# Altium PCB MercAp_PCB.PcbDoc
Units mm, origin at the board's own origin, x right, y up, seen from the top; angles counter-clockwise.
Board outline 70.1 x 75 mm, 4 copper layers (TopLayer, MidLayer1, MidLayer2, BottomLayer), stack 1.57 mm thick; 70 components, 34 nets, 192 pads, 44 vias.
Unrouted connection lines stored in the file: 9.
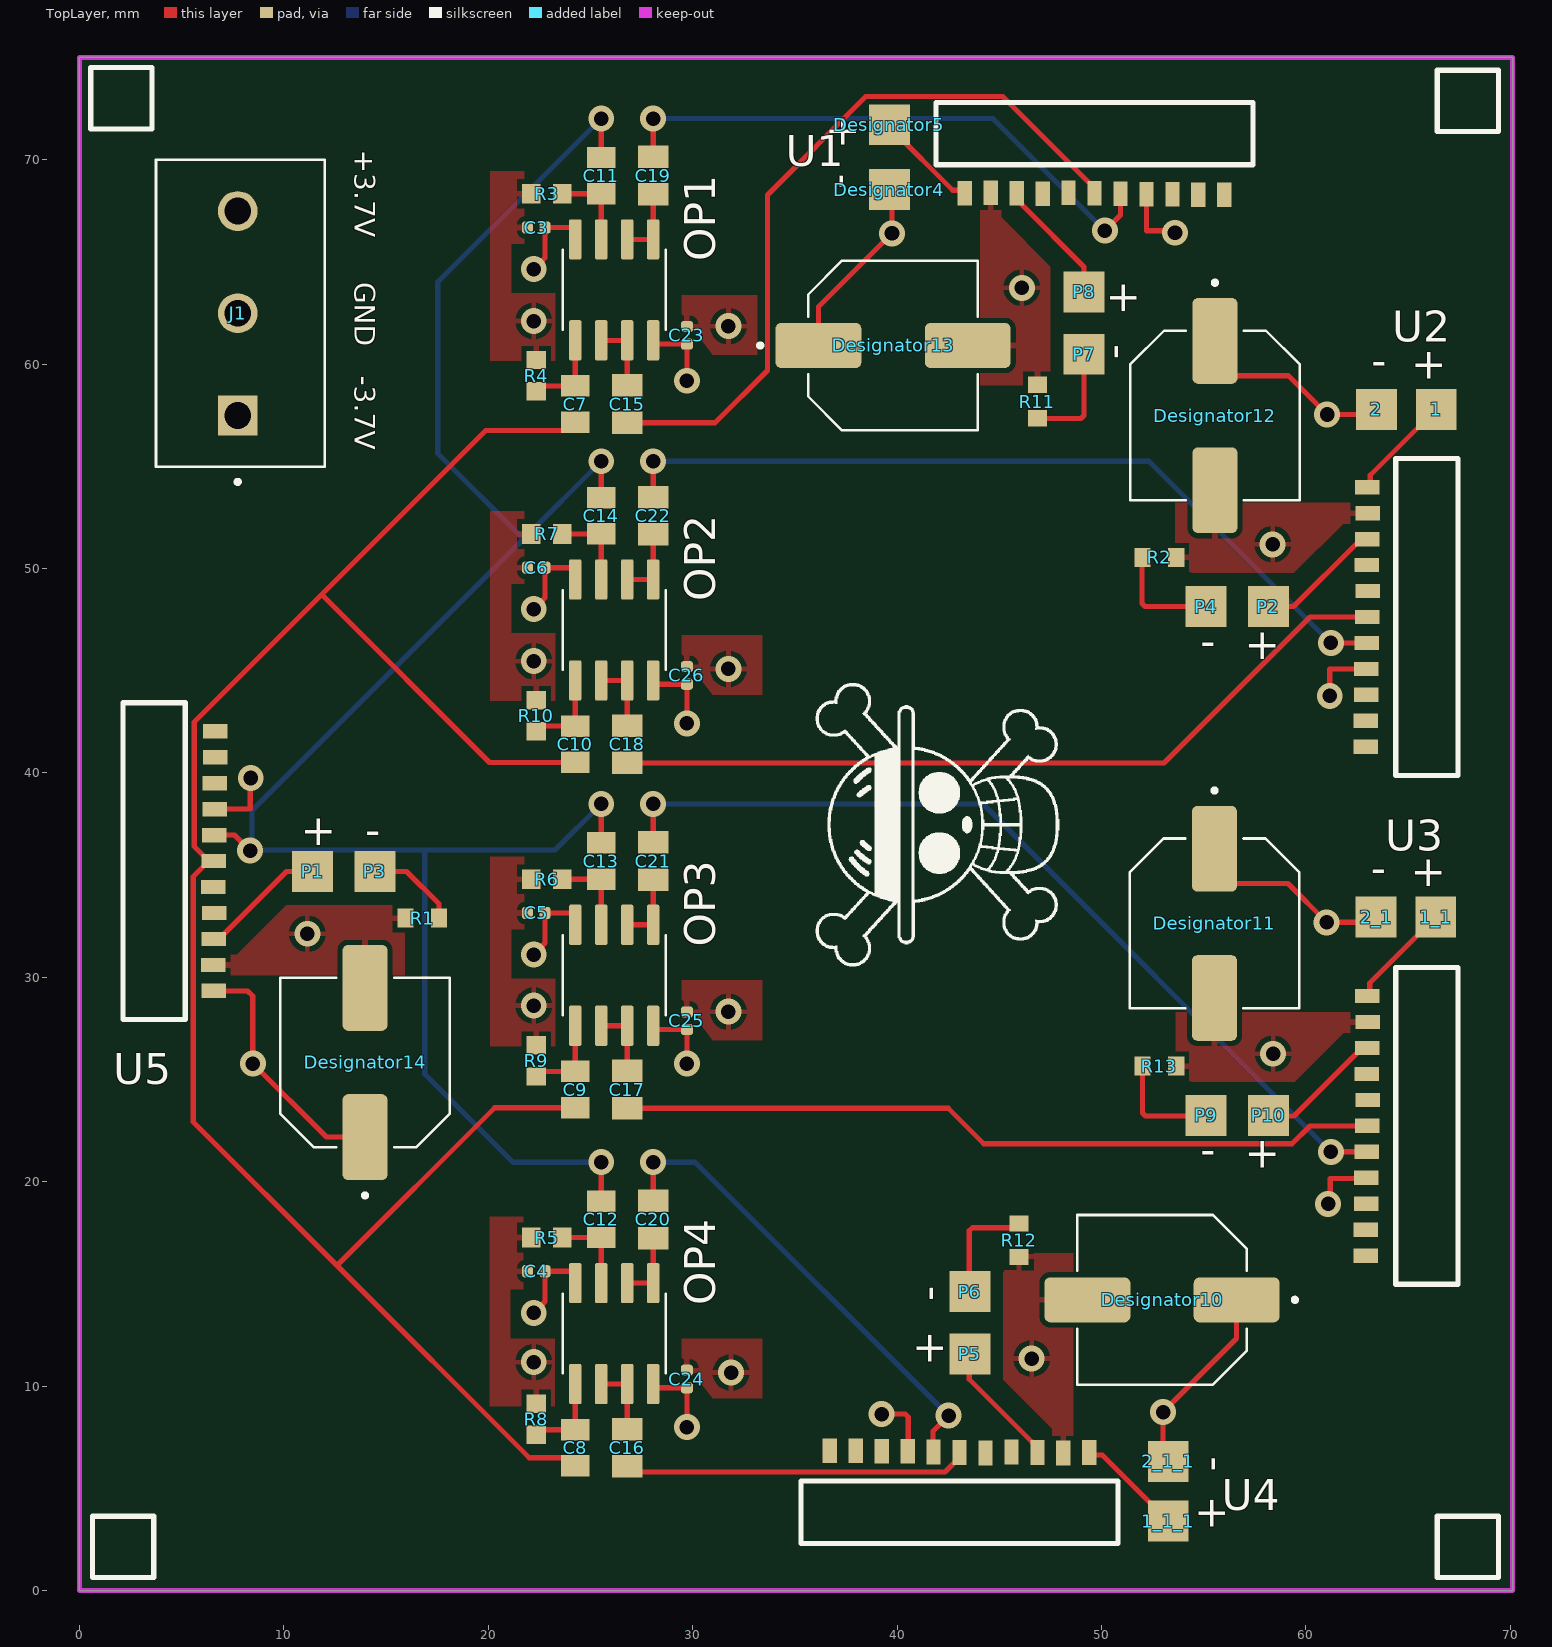
[diagram p0: TopLayer view]
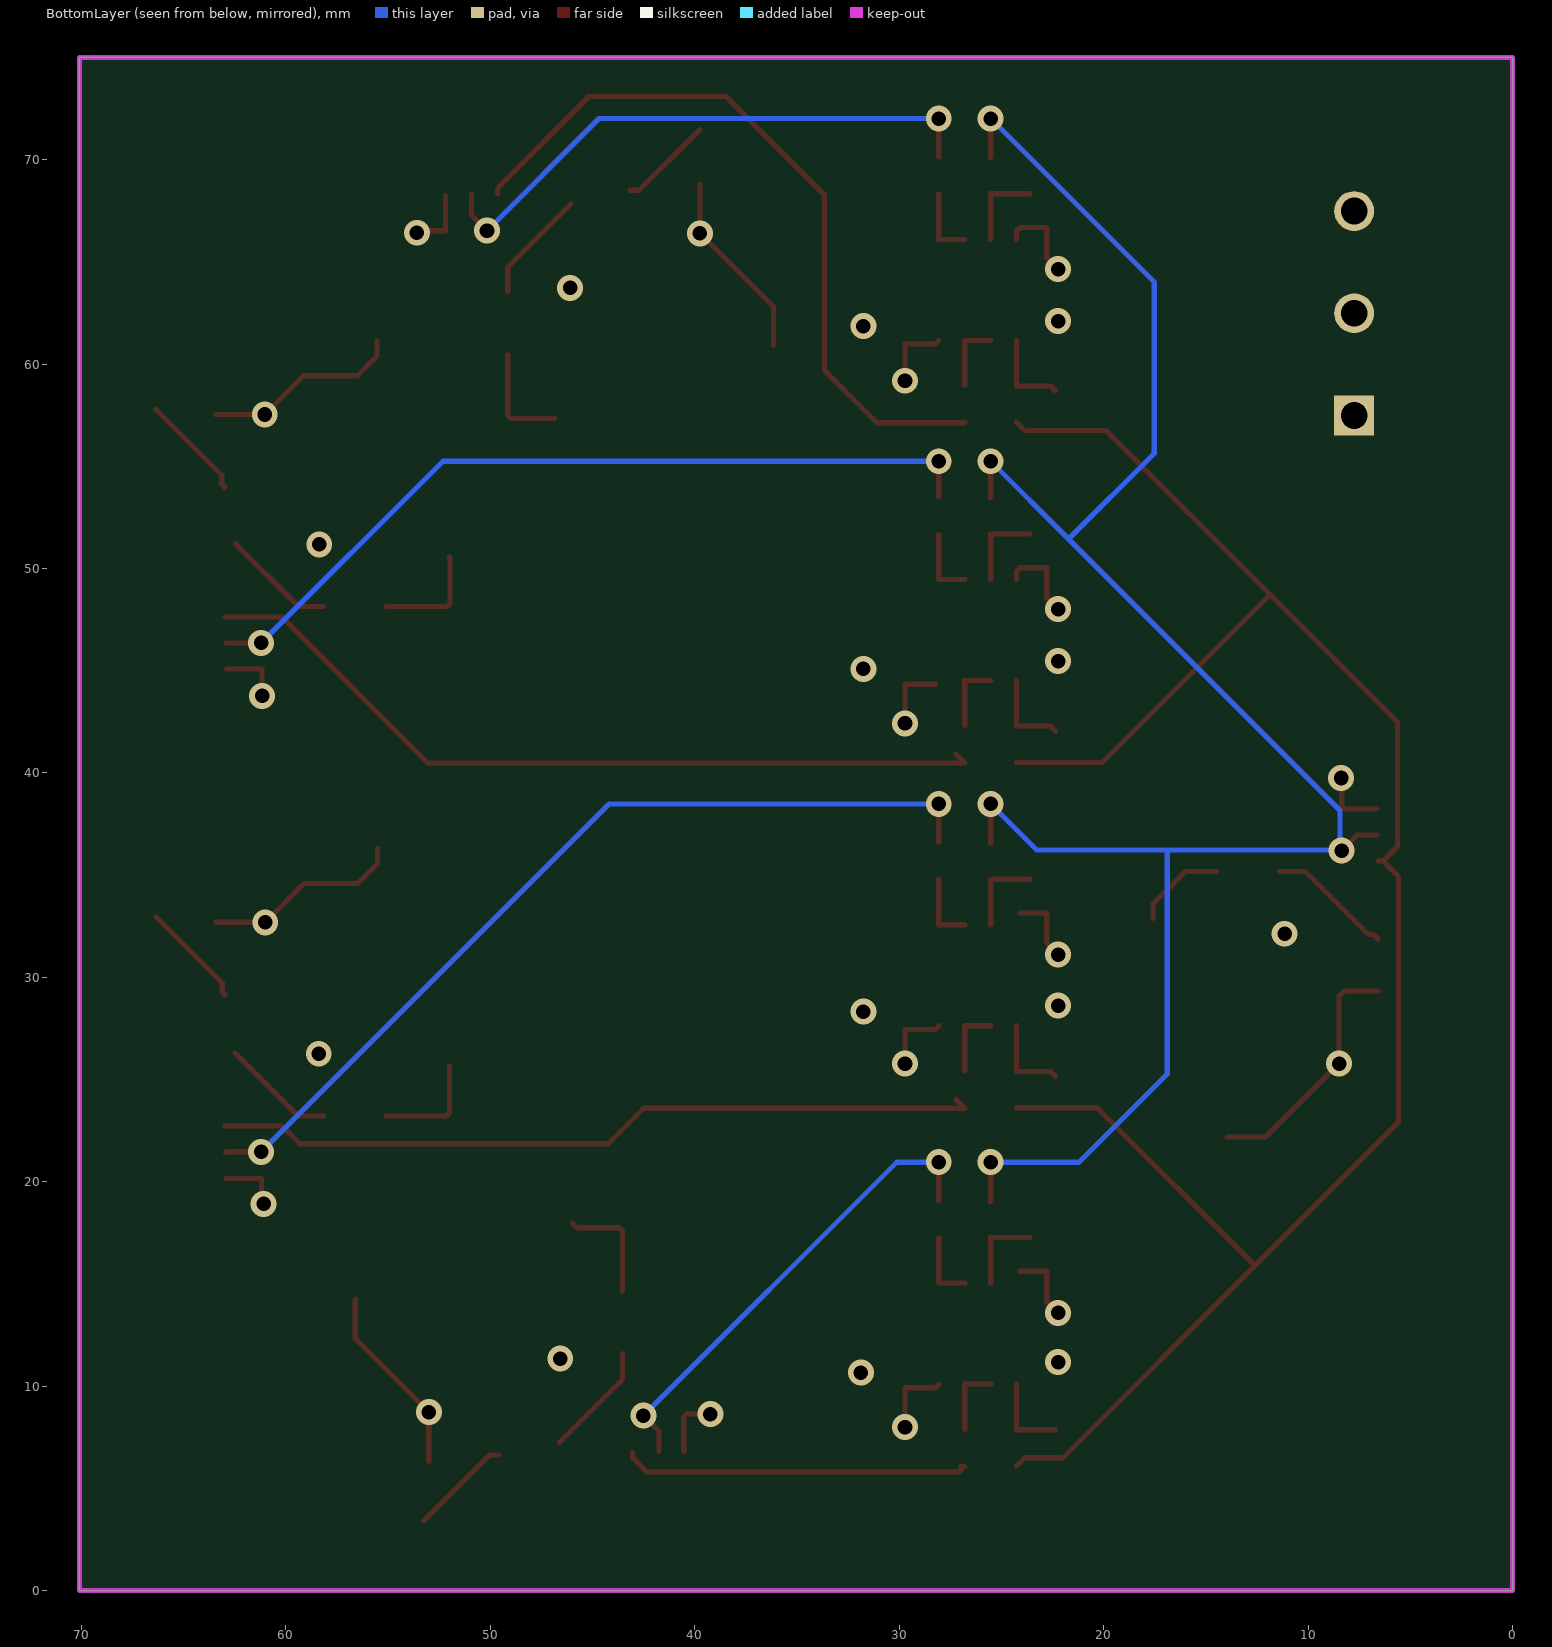
[diagram p1: BottomLayer view, seen from below]
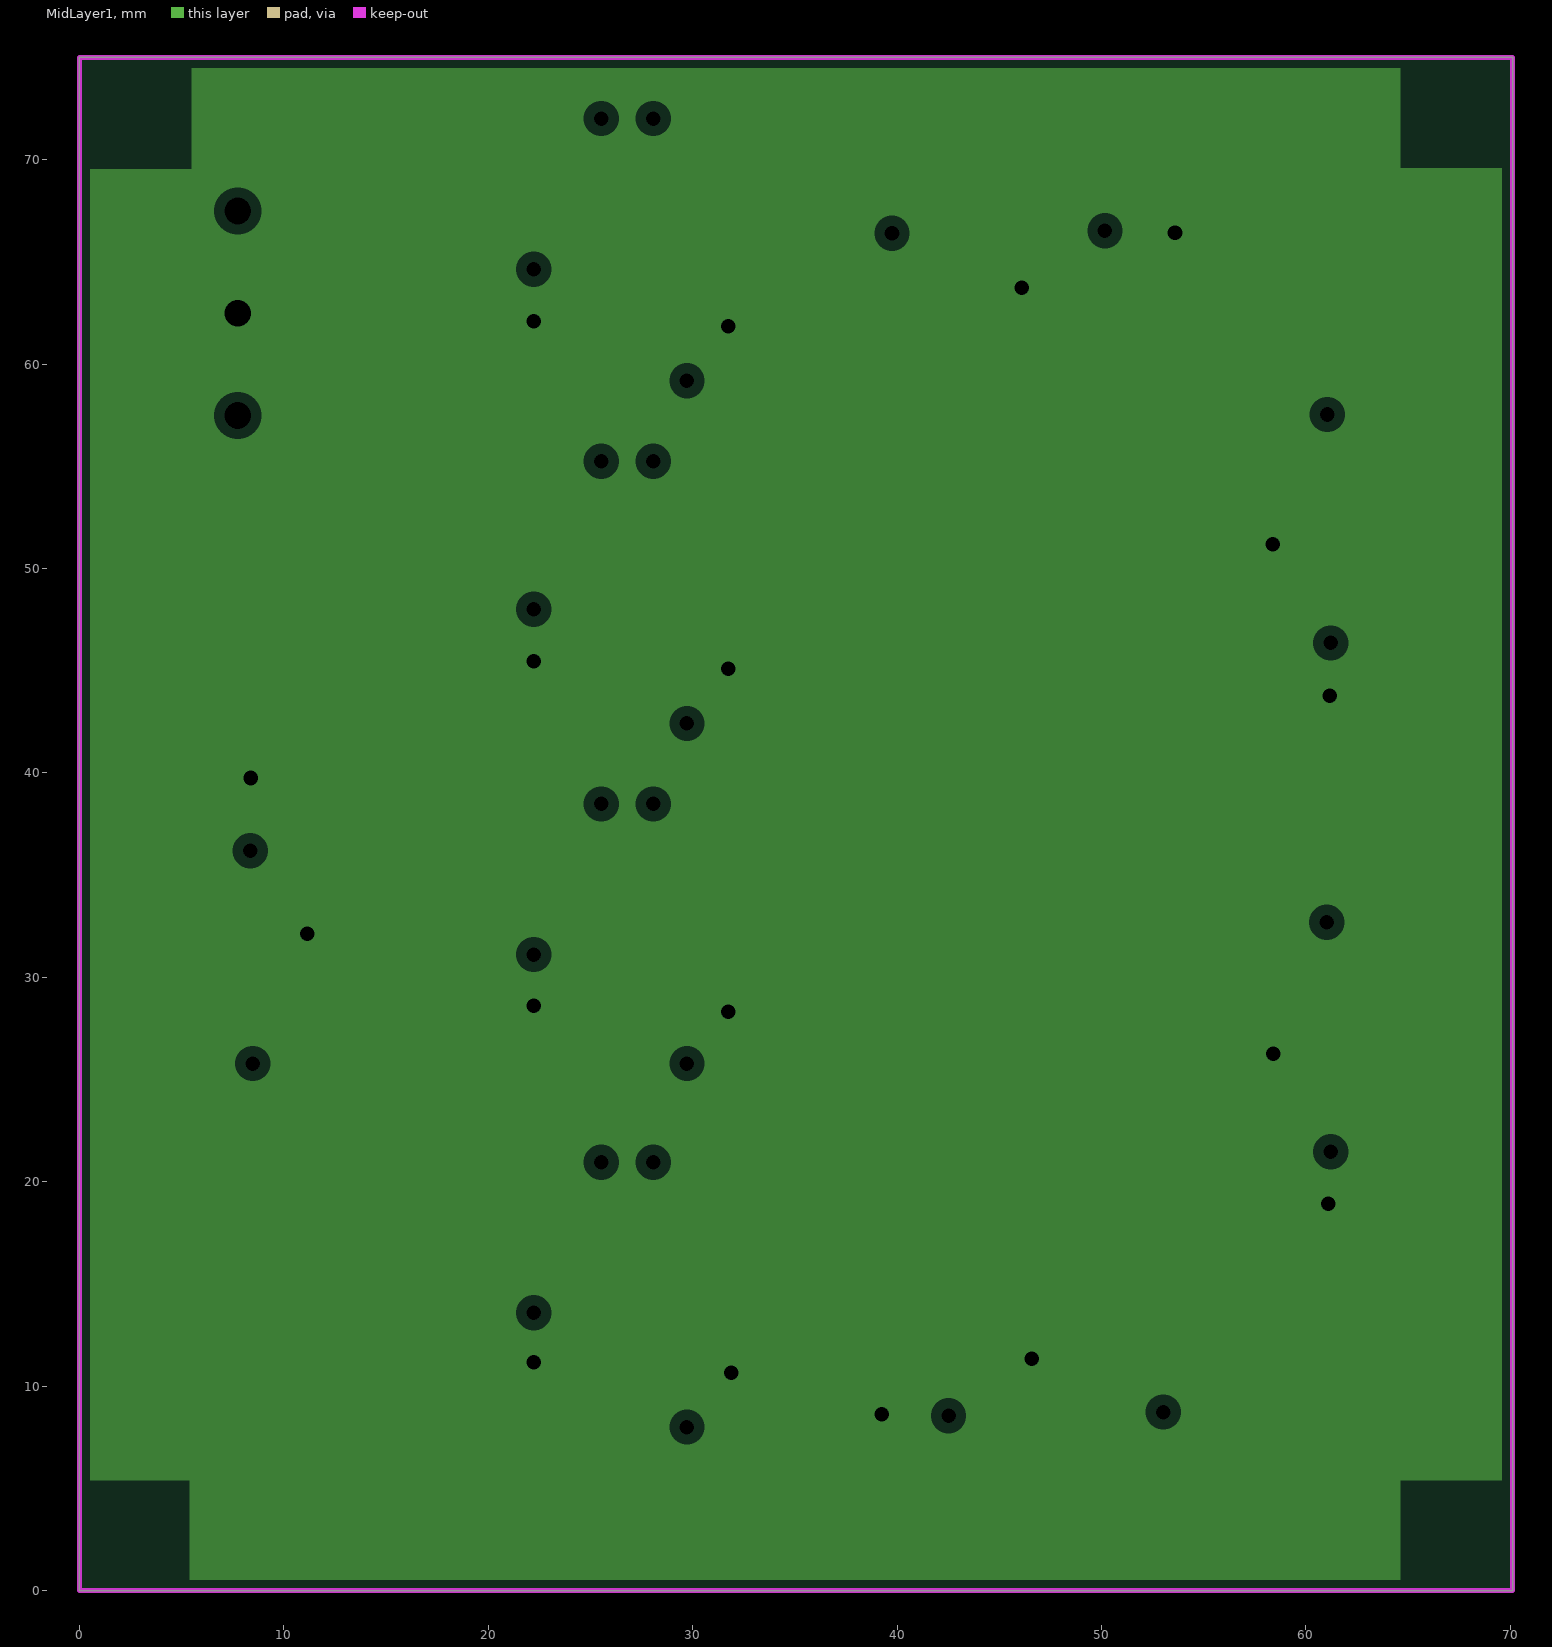
[diagram p2: MidLayer1, clearances drawn from the general rule]
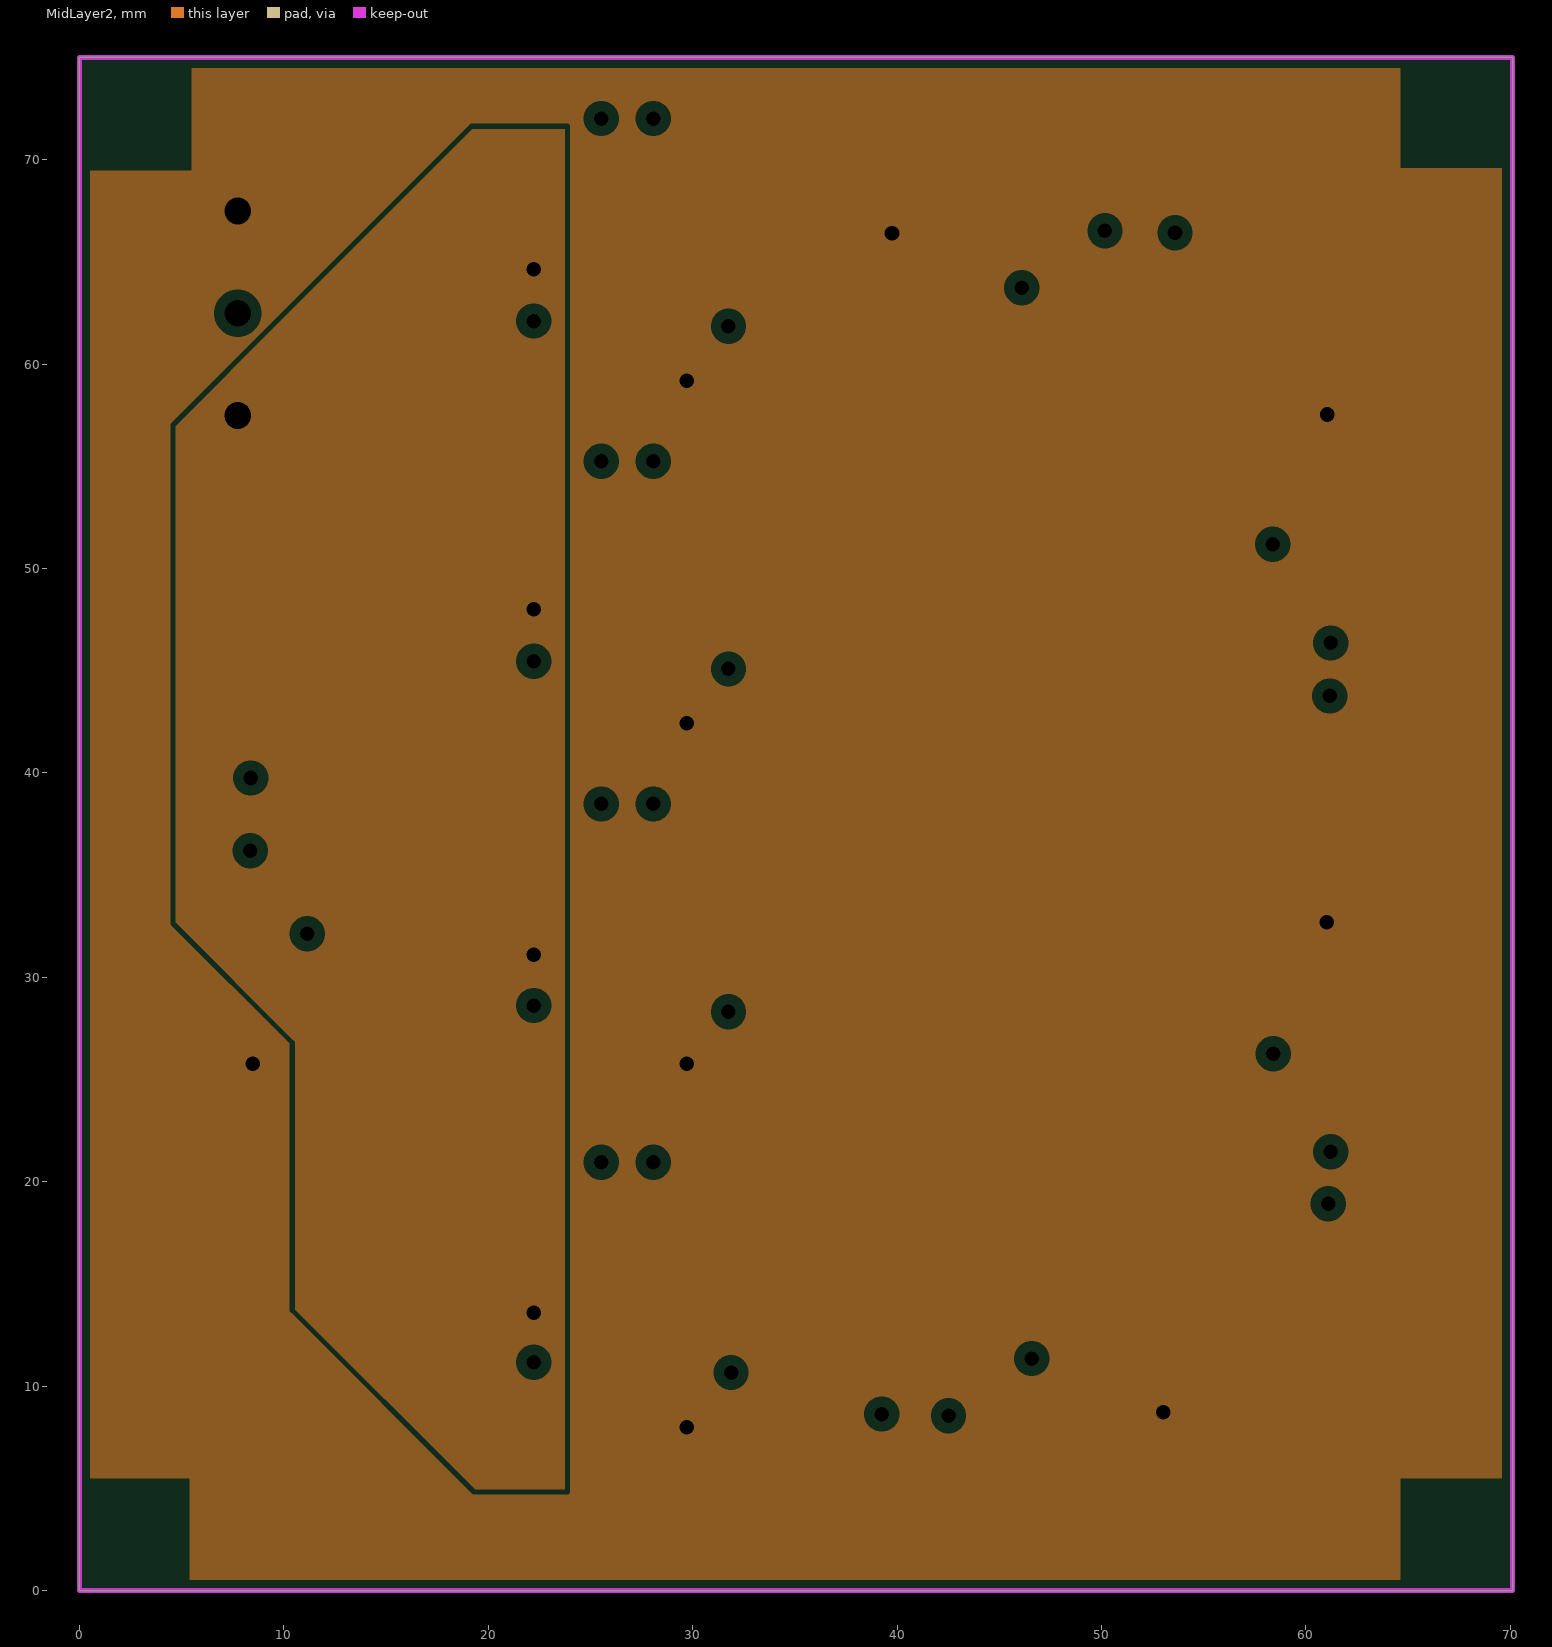
[diagram p3: MidLayer2, clearances drawn from the general rule]
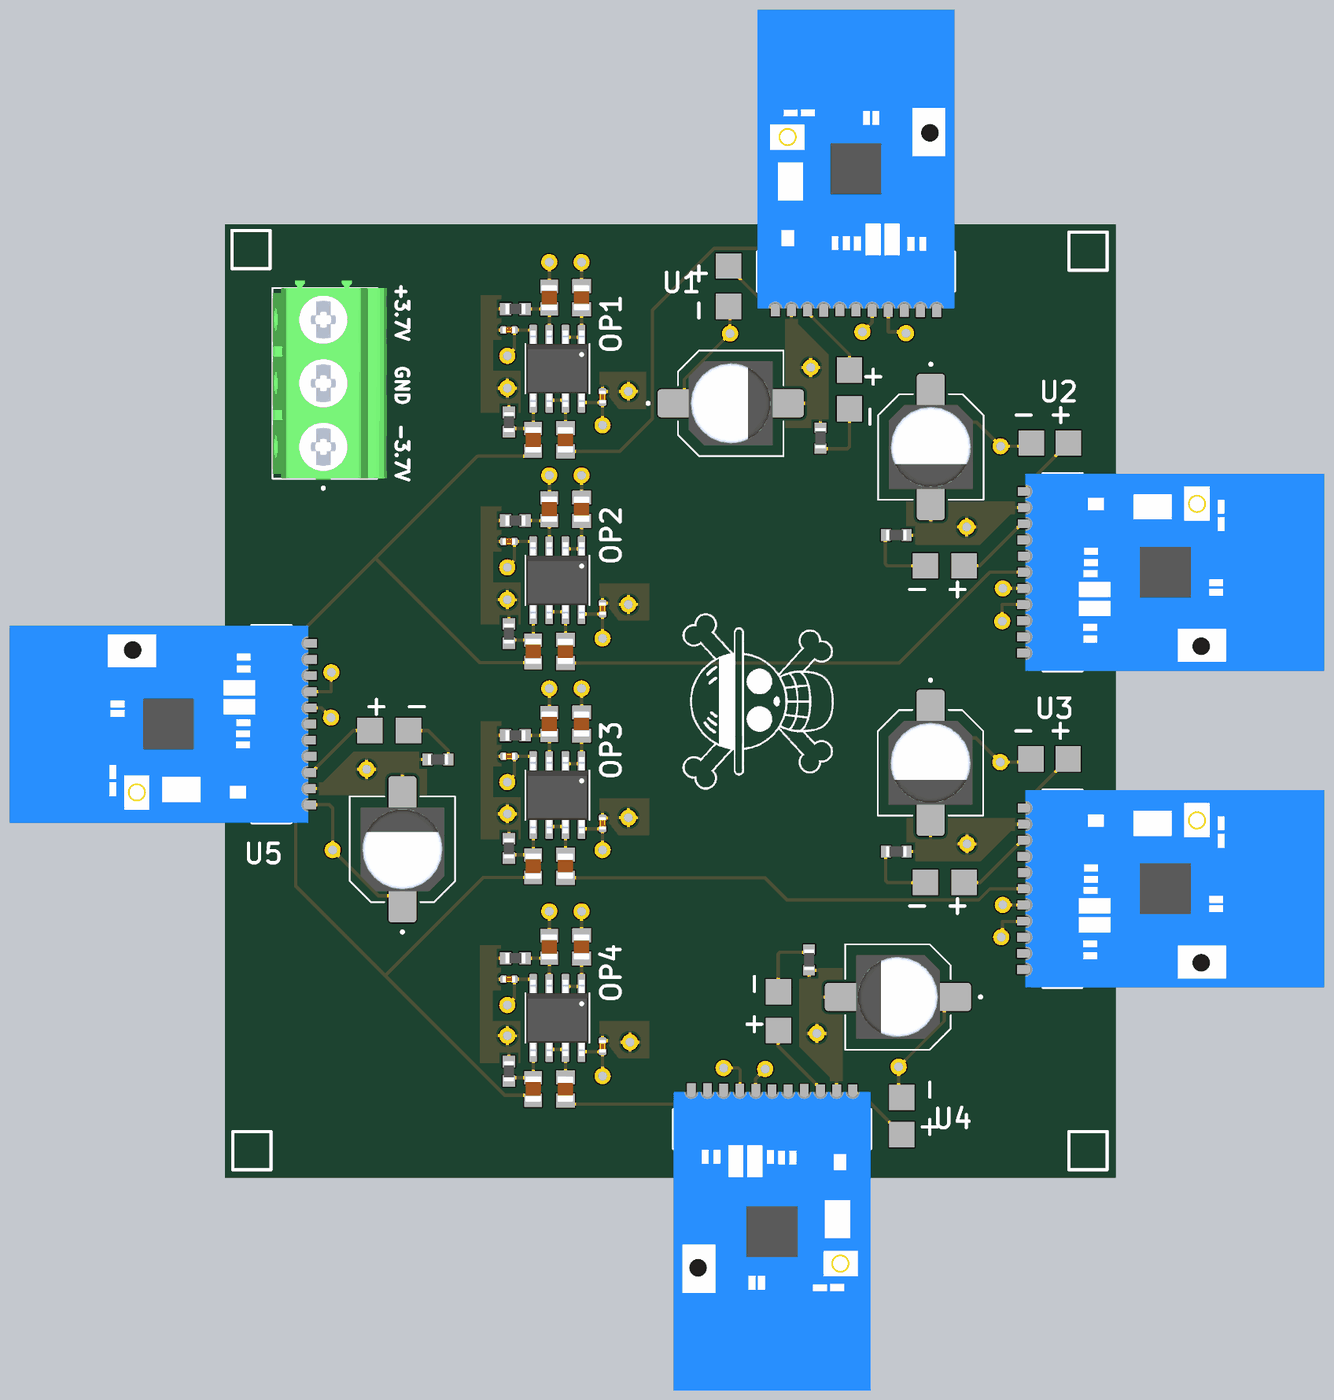
[diagram p4: 3D render of the assembled board from above, using the file's embedded part models]

## Layer stack, top to bottom
Top Solder: solder mask 0.015, Solder Resist, Dk 3.8
TopLayer: signal copper 0.035
Dielectric 2: prepreg 0.2, 7628, Dk 4.6
MidLayer1: plane copper 0.0175, net GND
Dielectric 1: core 1.065, FR-4, Dk 4.5
MidLayer2: plane copper 0.0175, net (Multiple Nets)
Dielectric 3: prepreg 0.2, 7628, Dk 4.6
BottomLayer: signal copper 0.035
Bottom Solder: solder mask 0.015, Solder Resist, Dk 3.8

## Board outline
0,0 0,75 70.104,75 70.104,0

## Design rules (kind name [scope] priority, off if disabled: settings)
Clearance [All] p1: gap=0.254 ignorepadtopadclearanceinfootprint=FALSE
PlaneClearance [All] p1: clearance=0.508
PlaneConnect [All] p1: planeconnectstyle=Relief reliefexpansion=0.508 reliefentries=4 reliefconductorwidth=0.254 reliefairgap=0.254
PolygonConnect [All] p1: connectstyle=Relief reliefconductorwidth=0.254 reliefentries=4 polygonreliefangle="90 Angle" airgapwidth=0.254
RoutingVias [All] p1: holewidth=0.711 width=1.27 viastyle="Through Hole" minholewidth=0.3 minwidth=0.45 maxholewidth=0.711 maxwidth=1.27
SolderMaskExpansion [All] p1: expansion=0.102 istentingtop=FALSE
Width [All] p1: maxlimit=0.254 minlimit=0.254 preferedwidth=0.254
28 further rules are at their usual default settings.

## Classes and differential pairs
component class Sheet1: C8 C10 C13 C14 C16 C18 C20 C22 C23 C25 C26 J1 OP1 OP3 OP4 P2 P8 P10 R2 R4 R6 R9 R10 R12 U2 U4

## Components (designator, comment, footprint, x,y, rotation, side; value= is the part's Value field where it differs from the comment)
1 "Comment" SolderWirePad_1x01_SMD_5x10mm 66.371,57.785 r180 top
1_1 "Comment" SolderWirePad_1x01_SMD_5x10mm 66.347,32.946 r180 top
1_1_1 "Comment" SolderWirePad_1x01_SMD_5x10mm 53.266,3.401 r90 top
2 "Comment" SolderWirePad_1x01_SMD_5x10mm 63.45,57.785 r180 top
2_1 "Comment" SolderWirePad_1x01_SMD_5x10mm 63.426,32.946 r180 top
2_1_1 "Comment" SolderWirePad_1x01_SMD_5x10mm 53.266,6.322 r90 top
C3 "CL05B104KP5NNNC" CAPC1005X55N 22.352,66.675 r0 top value=0.1uF (schematic designator C7)
C4 "CL05B104KP5NNNC" CAPC1005X55N 22.352,15.621 r0 top value=0.1uF (schematic designator C28)
C5 "CL05B104KP5NNNC" CAPC1005X55N 22.352,33.147 r0 top value=0.1uF (schematic designator C21)
C6 "CL05B104KP5NNNC" CAPC1005X55N 22.352,50.038 r0 top value=0.1uF (schematic designator C14)
C7 "GRM21BR61C106KE15K" CAPC2012X135N 24.257,58.039 r90 top value=10uF (schematic designator C6)
C8 "GRM21BR61C106KE15K" CAPC2012X135N 24.257,6.985 r90 top value=10uF (schematic designator C27)
C9 "GRM21BR61C106KE15K" CAPC2012X135N 24.257,24.511 r90 top value=10uF (schematic designator C20)
C10 "GRM21BR61C106KE15K" CAPC2012X135N 24.257,41.402 r90 top value=10uF (schematic designator C13)
C11 "GRM21BR61C106KE15K" CAPC2012X135N 25.527,69.215 r270 top value=10uF (schematic designator C5)
C12 "GRM21BR61C106KE15K" CAPC2012X135N 25.527,18.161 r270 top value=10uF (schematic designator C26)
C13 "GRM21BR61C106KE15K" CAPC2012X135N 25.527,35.687 r270 top value=10uF (schematic designator C19)
C14 "GRM21BR61C106KE15K" CAPC2012X135N 25.527,52.578 r270 top value=10uF (schematic designator C12)
C15 "JMK212BBJ476MG-T" CAPC2012X145N 26.797,58.039 r270 top value=47uF (schematic designator C4)
C16 "JMK212BBJ476MG-T" CAPC2012X145N 26.797,6.985 r270 top value=47uF (schematic designator C25)
C17 "JMK212BBJ476MG-T" CAPC2012X145N 26.797,24.511 r270 top value=47uF (schematic designator C18)
C18 "JMK212BBJ476MG-T" CAPC2012X145N 26.797,41.402 r270 top value=47uF (schematic designator C11)
C19 "JMK212BBJ476MG-T" CAPC2012X145N 28.067,69.215 r270 top value=47uF (schematic designator C2)
C20 "JMK212BBJ476MG-T" CAPC2012X145N 28.067,18.161 r270 top value=47uF (schematic designator C23)
C21 "JMK212BBJ476MG-T" CAPC2012X145N 28.067,35.687 r270 top value=47uF (schematic designator C16)
C22 "JMK212BBJ476MG-T" CAPC2012X145N 28.067,52.578 r270 top value=47uF (schematic designator C9)
C23 "CL05B104KP5NNNC" CAPC1005X55N 29.718,61.404 r90 top value=0.1uF (schematic designator C1)
C24 "CL05B104KP5NNNC" CAPC1005X55N 29.718,10.35 r90 top value=0.1uF (schematic designator C22)
C25 "CL05B104KP5NNNC" CAPC1005X55N 29.718,27.876 r90 top value=0.1uF (schematic designator C15)
C26 "CL05B104KP5NNNC" CAPC1005X55N 29.718,44.767 r90 top value=0.1uF (schematic designator C8)
Designator4 "Comment" SolderWirePad_1x01_SMD_5x10mm 39.624,68.53 r270 top
Designator5 "Comment" SolderWirePad_1x01_SMD_5x10mm 39.624,71.705 r270 top
Designator10 "Comment" CAPAE830X1000N 52.959,14.224 r180 top (schematic designator C24)
Designator11 "Comment" CAPAE830X1000N 55.524,32.639 r270 top (schematic designator C17)
Designator12 "Comment" CAPAE830X1000N 55.548,57.478 r270 top (schematic designator C10)
Designator13 "Comment" CAPAE830X1000N 39.804,60.907 r0 top (schematic designator C3)
Designator14 "Comment" CAPAE830X1000N 13.973,25.834 r90 top (schematic designator C24)
J1 "1935174" PHOENIX_1935174 11.997,54.984 r90 top
OP1 "NE5532DR" SOIC127P599X175-8N 26.162,63.627 r270 top
OP2 "NE5532DR" SOIC127P599X175-8N 26.162,46.99 r270 top
OP3 "NE5532DR" SOIC127P599X175-8N 26.162,30.099 r270 top
OP4 "NE5532DR" SOIC127P599X175-8N 26.162,12.573 r270 top
P1 "LED_PAD" SolderWirePad_1x01_SMD_5x10mm 11.405,35.179 r0 top (schematic designator P9)
P2 "LED_PAD" SolderWirePad_1x01_SMD_5x10mm 58.166,48.133 r180 top (schematic designator P3)
P3 "LED_PAD" SolderWirePad_1x01_SMD_5x10mm 14.453,35.179 r0 top (schematic designator P10)
P4 "LED_PAD" SolderWirePad_1x01_SMD_5x10mm 55.118,48.133 r180 top
P5 "LED_PAD" SolderWirePad_1x01_SMD_5x10mm 43.561,11.582 r90 top (schematic designator P7)
P6 "LED_PAD" SolderWirePad_1x01_SMD_5x10mm 43.561,14.63 r90 top (schematic designator P8)
P7 "LED_PAD" SolderWirePad_1x01_SMD_5x10mm 49.149,60.477 r270 top (schematic designator P2)
P8 "LED_PAD" SolderWirePad_1x01_SMD_5x10mm 49.149,63.525 r270 top (schematic designator P1)
P9 "LED_PAD" SolderWirePad_1x01_SMD_5x10mm 55.118,23.241 r180 top (schematic designator P6)
P10 "LED_PAD" SolderWirePad_1x01_SMD_5x10mm 58.166,23.241 r180 top (schematic designator P5)
R1 "RC0603JR-07330RL" RESC1608X55N 16.764,32.893 r0 top value=330R (schematic designator R13)
R2 "RC0603JR-07330RL" RESC1608X55N 52.832,50.546 r180 top value=330R (schematic designator R5)
R3 "RMCF0603FT1K00" RESC1508X55N 22.86,68.326 r0 top value=1kR (schematic designator R1)
R4 "RMCF0603FT1K00" RESC1508X55N 22.352,59.436 r270 top value=1kR (schematic designator R3)
R5 "RMCF0603FT1K00" RESC1508X55N 22.86,17.272 r0 top value=1kR (schematic designator R10)
R6 "RMCF0603FT1K00" RESC1508X55N 22.86,34.798 r0 top value=1kR (schematic designator R7)
R7 "RMCF0603FT1K00" RESC1508X55N 22.86,51.689 r0 top value=1kR (schematic designator R4)
R8 "RMCF0603FT1K00" RESC1508X55N 22.352,8.382 r270 top value=1kR (schematic designator R12)
R9 "RMCF0603FT1K00" RESC1508X55N 22.352,25.908 r270 top value=1kR
R10 "RMCF0603FT1K00" RESC1508X55N 22.352,42.799 r270 top value=1kR (schematic designator R6)
R11 "RC0603JR-07330RL" RESC1608X55N 46.863,58.166 r270 top value=330R (schematic designator R2)
R12 "RC0603JR-07330RL" RESC1608X55N 45.974,17.145 r90 top value=330R (schematic designator R11)
R13 "RC0603JR-07330RL" RESC1608X55N 52.832,25.654 r180 top value=330R (schematic designator R8)
U1 "KCX_BT_v1.4" kcx_bt_emitter_foot 43.307,68.351 r90 top
U2 "KCX_BT_v1.4" kcx_bt_emitter_foot 62.992,53.975 r0 top
U3 "KCX_BT_v1.4" kcx_bt_emitter_foot 62.992,29.083 r0 top
U4 "KCX_BT_v1.4" kcx_bt_emitter_foot 49.403,6.756 r270 top
U5 "KCX_BT_v1.4" kcx_bt_emitter_foot 6.579,29.337 r180 top

## Footprints (in the part's own frame and the unit in brackets; to place one, negate y for a bottom-side part, rotate by r counter-clockwise, add the part's x,y. Pads: shape width x height; smd on the part's side, far side on the other; paste and mask are expansions set on the pad)
CAPAE830X1000N [mm]
  rrect25% 4.2x2.2 smd: 1(-3.65,0) 2(3.65,0)
  silkscreen extent -6.6,-4.15 4.15,4.15, body extent -3.5,-3.3 3.5,3.3, height 7.55
CAPC1005X55N [mm]
  rrect53% 0.54x0.6 smd: 1(-0.43,0) 2(0.43,0)
  body extent -0.5,-0.25 0.5,0.25, height 0.55
CAPC2012X135N [mm]
  rect 1.05x1.38 smd: 1(-0.888,0) 2(0.888,0)
  body extent -1,-0.63 1,0.63, height 1.35
CAPC2012X145N [mm]
  rect 1.1x1.48 smd: 1(-0.913,0) 2(0.913,0)
  body extent -1,-0.63 1,0.63, height 1.45
kcx_bt_emitter_foot [mm] "footprint for the kcx bt emitter"
  rect 1.2x0.7 smd: 1(0,0) 2(0.025,-1.27) 3(0,-2.54) 4(-0.025,-3.81) 5(0.025,-5.08) 6(0,-6.35) 7(-0.025,-7.62) 8(-0.05,-8.89) 9(-0.05,-10.16) 10(-0.075,-11.43) 11(-0.075,-12.7)
  silkscreen extent 1.4,-14.1 4.45,1.4, body extent 0,-14.1 23.5,1.4, height 1.4
PHOENIX_1935174 [mm]
  rect 1.95x1.95 / inner round 1.95 / far side rect 1.95x1.95 hole 1.3: 1(2.5,4.25)
  round 1.95 hole 1.3: 2(7.5,4.25) 3(12.5,4.25)
  silkscreen extent -0.85,0 15,8.25, body extent -0.1,-0.75 15.57,8.25, height 11.55
RESC1508X55N [mm]
  rect 0.9x0.97 smd: 1(-0.76,0) 2(0.76,0)
  body extent -0.77,-0.4 0.77,0.4, height 0.55
RESC1608X55N [mm]
  rect 0.79x0.93 smd: 1(-0.82,0) 2(0.82,0)
  body extent -0.8,-0.4 0.8,0.4, height 0.55
SOIC127P599X175-8N [mm]
  rrect25% 1.97x0.6 smd: 1(-2.47,1.905) 2(-2.47,0.635) 3(-2.47,-0.635) 4(-2.47,-1.905) 5(2.47,-1.905) 6(2.47,-0.635) 7(2.47,0.635) 8(2.47,1.905)
  silkscreen extent -1.95,-2.52 1.95,2.52, body extent -3,-2.45 3,2.45, height 1.75
SolderWirePad_1x01_SMD_5x10mm [mm]
  rect 2x2 smd: 1(0,0)

## Part data
C3 C4 C5 C6 C23 C24 C25 C26: "Ceramic Capacitor, Multilayer, Ceramic, 10V, 10% +Tol, 10% -Tol, X7R, 15% TC, 0.1uF, Surface Mount, 0402", Capacitor Type=Ceramic, Case/Package=0402, Manufacturer=Samsung, Max Operating Temperature=125°C, Min Operating Temperature=-55°C, Package Shape=Rectangular, Package Style=SMTMeter, Rated DC Voltage (URdc)=10V, Supplier Part Number=1276-1002-1-ND, Temperature Characteristics Code=X7R, Tolerance  (fill in as +-)=10%, Category="Ceramic Capacitors", ComponentLink1Description=https://datasheet.ciiva.com:443/pdfs/VipMasterIC/IC/SEMS/SEMS-S-A0008523115/SEMS-S-A0008523129-1.pdf?src-supplier=IHS+Markit, ComponentLink1URL=https://datasheet.ciiva.com:443/pdfs/VipMasterIC/IC/SEMS/SEMS-S-A0008523115/SEMS-S-A0008523129-1.pdf?src-supplier=IHS+Markit, ComponentLink2Description=https://datasheet.ciiva.com/15165/getdatasheetpartid-37100-15165107.pdf?src-supplier=Verical, ComponentLink2URL=https://datasheet.ciiva.com/15165/getdatasheetpartid-37100-15165107.pdf?src-supplier=Verical, ComponentLink3Description=https://datasheet.ciiva.com/16498/cl05b104kq5nnnc-16498491.pdf?src-supplier=Future+Electronics, ComponentLink3URL=https://datasheet.ciiva.com/16498/cl05b104kq5nnnc-16498491.pdf?src-supplier=Future+Electronics, Dielectric Material=Ceramic, Height=0.5mm, JESD-609 Code=e3, Length=1mm, Manufacturer Part Number=CL05B104KP5NNNC, Mounting Technology="Surface Mount", Multilayer=Yes, Packaging="Tape and Reel", Pins=2, Pricing="1=0.08, 10=0.004, 100=0.0036, 1000=0.0032 (USD)", Reach SVHC Compliant=Yes, RoHS=Yes, RoHS Compliant=Yes, Stock=29763823, Supplier=Digikey, Terminal Finish=Nickel, Termination=Wraparound, Tolerance (fill in as +-)=10%, Width=0.5mm
C7 C8 C9 C10 C11 C12 C13 C14: "Ceramic Capacitor, Multilayer, Ceramic, 16V, 10% +Tol, 10% -Tol, X5R, 15% TC, 10uF, Surface Mount, 0805", Capacitor Type=Ceramic, Case/Package=0805, Manufacturer=Murata, Max Operating Temperature=85°C, Min Operating Temperature=-55°C, Package Shape=Rectangular, Package Style=SMTMeter, Rated DC Voltage (URdc)=16V, Supplier Part Number=490-6473-1-ND, Temperature Characteristics Code=X5R, Tolerance  (fill in as +-)=10%, Category="Ceramic Capacitors", ComponentLink1Description=https://psearch.en.murata.com:443/capacitor/product/GRM21BR61C106KE15%23.pdf?src-supplier=IHS+Markit, ComponentLink1URL=https://psearch.en.murata.com:443/capacitor/product/GRM21BR61C106KE15%23.pdf?src-supplier=IHS+Markit, ComponentLink2Description=https://datasheet.ciiva.com/26822/getdatasheetpartid-31687-26822939.pdf?src-supplier=Verical, ComponentLink2URL=https://datasheet.ciiva.com/26822/getdatasheetpartid-31687-26822939.pdf?src-supplier=Verical, ComponentLink3Description=https://datasheet.ciiva.com/5414/product-5414934.pdf?src-supplier=Mouser, ComponentLink3URL=https://datasheet.ciiva.com/5414/product-5414934.pdf?src-supplier=Mouser, ComponentLink4Description=https://datasheet.ciiva.com/6270/partnumbering-e-01-6270407.pdf?src-supplier=Digikey, ComponentLink4URL=https://datasheet.ciiva.com/6270/partnumbering-e-01-6270407.pdf?src-supplier=Digikey, ComponentLink5Description=https://datasheet.ciiva.com/6270/partnumbering-e-01-6270410.pdf?src-supplier=Digikey, ComponentLink5URL=https://datasheet.ciiva.com/6270/partnumbering-e-01-6270410.pdf?src-supplier=Digikey, ComponentLink6Description=https://datasheet.ciiva.com/6270/partnumbering-e-01-6270412.pdf?src-supplier=Digikey, ComponentLink6URL=https://datasheet.ciiva.com/6270/partnumbering-e-01-6270412.pdf?src-supplier=Digikey, Dielectric Material=Ceramic, Height=1.25mm, JESD-609 Code=e3, Length=2mm, Manufacturer Part Number=GRM21BR61C106KE15K, Mounting Technology="Surface Mount", Multilayer=Yes, Packaging="Tape and Reel", Pins=2, Pricing="1=0.14, 10=0.081, 100=0.0497, 1000=0.03306, 2500=0.0261 (USD)", Reach SVHC Compliant=Yes, RoHS=Yes, RoHS Compliant=Yes, Stock=950706, Supplier=Digikey, Terminal Finish=Nickel, Termination=Wraparound, Tolerance (fill in as +-)=10%, Width=1.25mm
C15 C16 C17 C18 C19 C20 C21 C22: "Ceramic Capacitor, Multilayer, Ceramic, 6.3V, 20% +Tol, 20% -Tol, X5R, 15% TC, 47uF, Surface Mount, 0805", Capacitor Type=Ceramic, Case/Package=0805, Manufacturer="Taiyo Yuden", Max Operating Temperature=85°C, Min Operating Temperature=-55°C, Package Shape=Rectangular, Package Style=SMTMeter, Rated DC Voltage (URdc)=6.3V, Supplier Part Number=587-4280-1-ND, Temperature Characteristics Code=X5R, Tolerance  (fill in as +-)=20%, Category="Ceramic Capacitors", ComponentLink1Description=https://datasheet.ciiva.com:443/pdfs/VipMasterIC/IC/TAIY/TAIY-S-A0008883757/TAIY-S-A0008884245-1.pdf?src-supplier=IHS+Markit, ComponentLink1URL=https://datasheet.ciiva.com:443/pdfs/VipMasterIC/IC/TAIY/TAIY-S-A0008883757/TAIY-S-A0008884245-1.pdf?src-supplier=IHS+Markit, ComponentLink2Description=https://datasheet.ciiva.com/11596/jmk212bbj476mg-t-ss-11596928.pdf?src-supplier=Avnet, ComponentLink2URL=https://datasheet.ciiva.com/11596/jmk212bbj476mg-t-ss-11596928.pdf?src-supplier=Avnet, Dielectric Material=Ceramic, Height=1.25mm, JESD-609 Code=e3, Length=2mm, Manufacturer Part Number=JMK212BBJ476MG-T, Mounting Technology="Surface Mount", Multilayer=Yes, Packaging="Tape and Reel", Pins=2, Pricing="1=0.32, 10=0.188, 100=0.122, 1000=0.08778 (USD)", Reach SVHC Compliant=Yes, RoHS=Yes, RoHS Compliant=Yes, Stock=804956, Supplier=Digikey, Terminal Finish=Nickel, Termination=Wraparound, Tolerance (fill in as +-)=20%, Width=1.25mm
J1: "Barrier Strip Terminal Block, 17.5A, 1.5mm2, 1 Row(s), 1 Deck(s)", Current Rating=17.5A, Manufacturer="Phoenix Contact", Supplier Part Number=277-1578-ND, Voltage Rating=250V, Category="Terminal Blocks", ComponentLink1Description=https://datasheet.ciiva.com:443/pdfs/VipMasterIC/IC/PCON/PCON-S-A0007661889/PCON-S-A0008047997-1.pdf?src-supplier=IHS+Markit, ComponentLink1URL=https://datasheet.ciiva.com:443/pdfs/VipMasterIC/IC/PCON/PCON-S-A0007661889/PCON-S-A0008047997-1.pdf?src-supplier=IHS+Markit, ComponentLink2Description=https://datasheet.ciiva.com/16047/1935174-16047249.pdf?src-supplier=Onlinecomponents.com, ComponentLink2URL=https://datasheet.ciiva.com/16047/1935174-16047249.pdf?src-supplier=Onlinecomponents.com, ComponentLink3Description=https://datasheet.ciiva.com/15169/getdatasheetpartid-212213-15169949.pdf?src-supplier=Verical, ComponentLink3URL=https://datasheet.ciiva.com/15169/getdatasheetpartid-212213-15169949.pdf?src-supplier=Verical, ComponentLink4Description=https://datasheet.ciiva.com/823/combiconcompact5-0mmseries-823761.pdf?src-supplier=Digikey, ComponentLink4URL=https://datasheet.ciiva.com/823/combiconcompact5-0mmseries-823761.pdf?src-supplier=Digikey, ComponentLink5Description=https://datasheet.ciiva.com/29218/744167-da-01-en-printklemme-pt-1-5-3-5-0-h-29218252.pdf?src-supplier=Conrad, ComponentLink5URL=https://datasheet.ciiva.com/29218/744167-da-01-en-printklemme-pt-1-5-3-5-0-h-29218252.pdf?src-supplier=Conrad, Fastening Method=SCREW, Manufacturer Part Number=1935174, Manufacturer Series=1935174, Mounting Technology=Board, Number of Decks=1, Number of Rows=1, Number of Ways=3, Pricing="1=1.04, 10=0.748, 25=0.6516, 50=0.5892, 100=0.5688 (USD)", Reach SVHC Compliant=No, RoHS=Yes, RoHS Compliant=Yes, Safety Approval=UL, Stock=22673, Supplier=Digikey, Terminal and Terminal Block Type="BARRIER STRIP TERMINAL BLOCK", Wire Cross Section=1.5mm2, Wire/Cable Gauge=14AWG
OP1 OP2 OP3 OP4: "Operational Amplifier, 2 Func, 5000uV Offset-Max, BIPolar, PDSO8", Average Bias Current-Max (IIB)=1uA, Bias Current-Max (IIB) @25C=800nA, Case/Package=SOP, Frequency Compensation=YES, Input Offset Voltage-Max=5mV, Manufacturer="Texas Instruments", Max Operating Temperature=70°C, Max Supply Current=16mA, Min Operating Temperature=0°C, Neg Supply Voltage Limit-Max=-22V, Neg Supply Voltage-Nom (Vsup)=-15V, Nominal Supply Voltage=15V, Package Body Material=Plastic, Package Equivalence Code=SOP8,.25, Package Shape=Rectangular, Package Style="SMALL OUTLINEMeter", Peak Reflow Temperature (Cel)=260°C, Power Supplies=+-5/+-15/10/30V, Supplier Part Number=296-13622-1-ND, Supply Voltage Limit-Max=22V, Temperature Grade=COMMERCIAL, Voltage Gain-Min=10000, Amplifier Type="OPERATIONAL AMPLIFIER", Architecture=VOLTAGE-FEEDBACK, Category="Amplifiers - Op Amps, Buffer, Instrumentation", Channels=2, Common-mode Reject Ratio-Nom=100dB, ComponentLink1Description=https://www.ti.com:443/lit/ds/symlink/ne5532.pdf?src-supplier=IHS+Markit, ComponentLink1URL=https://www.ti.com:443/lit/ds/symlink/ne5532.pdf?src-supplier=IHS+Markit, ComponentLink2Description=https://datasheet.ciiva.com/1796/ne5532-1796189.pdf?src-supplier=Digikey, ComponentLink2URL=https://datasheet.ciiva.com/1796/ne5532-1796189.pdf?src-supplier=Digikey, ComponentLink3Description=https://datasheet.ciiva.com/1796/ne5532-1796190.pdf?src-supplier=Digikey, ComponentLink3URL=https://datasheet.ciiva.com/1796/ne5532-1796190.pdf?src-supplier=Digikey, ComponentLink4Description=https://datasheet.ciiva.com/1796/ne5532-1796191.pdf?src-supplier=Digikey, ComponentLink4URL=https://datasheet.ciiva.com/1796/ne5532-1796191.pdf?src-supplier=Digikey, Height - Seated (Max)=1.75mm, JESD-30 Code=R-PDSO-G8, JESD-609 Code=e3, Length=4.9mm, Low-Offset=No, Manufacturer Part Number=NE5532DR, Moisture Sensitivity Level=1, Packaging="Tape and Reel", Pins=8, Pricing="1=0.39, 10=0.269, 25=0.2392, 100=0.2066, 250=0.19116, 500=0.18184, 1000=0.17415 (USD)", Qualification Status="Not Qualified", Reach SVHC Compliant=Yes, RoHS=Yes, RoHS Compliant=Yes, Slew Rate=9V/µs, Stock=16144, Supplier=Digikey, Surface Mount=Yes, Technology=BIPOLAR, Terminal Finish=Tin, Terminal Form="Gull Wing", Terminal Pitch=1.27mm, Terminal Position=DUAL, Unity Gain BW-Nom=10MHz, Width=3.9mm
R1 R2 R11 R12 R13: "Fixed Resistor, Metal Glaze/thick Film, 0.1W, 330ohm, 75V, 5% +/-Tol, 100ppm/Cel, Surface Mount, 0603", Case/Package=0603, Manufacturer=Yageo, Max Operating Temperature=155°C, Min Operating Temperature=-55°C, Package Height=0.45mm, Package Length=1.6mm, Package Shape=Rectangular, Package Width=0.8mm, Power=100mW, Rated Temperature=70°C, Resistor Type="FIXED RESISTOR", Supplier Part Number=311-330GRCT-ND, Temperature Coefficient (ppm/Cel)=100, Tolerance=5%, Working Voltage=75V, Additional Feature="LASER TRIMMABLE", Category="Chip SMD Resistors", ComponentLink1Description=https://datasheet.ciiva.com:443/pdfs/VipMasterIC/IC/YAGO/YAGO-S-A0008145938/YAGO-S-A0008145938-1.pdf?src-supplier=IHS+Markit, ComponentLink1URL=https://datasheet.ciiva.com:443/pdfs/VipMasterIC/IC/YAGO/YAGO-S-A0008145938/YAGO-S-A0008145938-1.pdf?src-supplier=IHS+Markit, ComponentLink2Description=https://datasheet.ciiva.com/46395/443971-46395145.pdf?src-supplier=Element14, ComponentLink2URL=https://datasheet.ciiva.com/46395/443971-46395145.pdf?src-supplier=Element14, ComponentLink3Description=https://datasheet.ciiva.com/12558/rc0603-272842-12558685.pdf?src-supplier=Mouser, ComponentLink3URL=https://datasheet.ciiva.com/12558/rc0603-272842-12558685.pdf?src-supplier=Mouser, ComponentLink4Description=https://datasheet.ciiva.com/7746/1868787-7746487.pdf?src-supplier=Element14, ComponentLink4URL=https://datasheet.ciiva.com/7746/1868787-7746487.pdf?src-supplier=Element14, ComponentLink5Description=https://datasheet.ciiva.com/7746/443971-7746488.pdf?src-supplier=Element14, ComponentLink5URL=https://datasheet.ciiva.com/7746/443971-7746488.pdf?src-supplier=Element14, Construction=Chip, JESD-609 Code=e3, Manufacturer Part Number=RC0603JR-07330RL, Mounting Technology="Surface Mount", Packaging="Tape and Reel", Pins=2, Pricing="1=0.1, 10=0.006, 50=0.0056, 100=0.0051, 500=0.00502 (USD)", Reach SVHC Compliant=Yes, RoHS=Yes, RoHS Compliant=Yes, Stock=1661244, Supplier=Digikey, Technology="METAL GLAZE/THICK FILM", Terminal Finish=Nickel, Termination=Wraparound
R3 R4 R5 R6 R7 R8 R9 R10: "Fixed Resistor, Metal Glaze/thick Film, 0.1W, 1000ohm, 75V, 1% +/-Tol, 100ppm/Cel, Surface Mount, 0603", Case/Package=0603, Manufacturer="Stackpole Electronics", Max Operating Temperature=155°C, Min Operating Temperature=-55°C, Package Height=0.45mm, Package Length=1.55mm, Package Shape=Rectangular, Package Width=0.8mm, Power=100mW, Rated Temperature=70°C, Resistor Type="FIXED RESISTOR", Supplier Part Number=RMCF0603FT1K00CT-ND, Temperature Coefficient (ppm/Cel)=100, Tolerance=1%, Working Voltage=75V, Category="Chip SMD Resistors", ComponentLink1Description=https://datasheet.ciiva.com:443/pdfs/VipMasterIC/IC/SEIE/SEIE-S-A0009541969/SEIE-S-A0009541969-1.pdf?src-supplier=IHS+Markit, ComponentLink1URL=https://datasheet.ciiva.com:443/pdfs/VipMasterIC/IC/SEIE/SEIE-S-A0009541969/SEIE-S-A0009541969-1.pdf?src-supplier=IHS+Markit, ComponentLink2Description=https://datasheet.octopart.com/RMCF0603FT1K00-Stackpole-Electronics-datasheet-11547379.pdf?src-supplier=Future+Electronics, ComponentLink2URL=https://datasheet.octopart.com/RMCF0603FT1K00-Stackpole-Electronics-datasheet-11547379.pdf?src-supplier=Future+Electronics, ComponentLink3Description=https://www.seielect.com/catalog/SEI-Packaging.pdf?src-supplier=Avnet, ComponentLink3URL=https://www.seielect.com/catalog/SEI-Packaging.pdf?src-supplier=Avnet, ComponentLink4Description=https://www.seielect.com/catalog/SEI-Packaging.pdf?src-supplier=Arrow+Electronics, ComponentLink4URL=https://www.seielect.com/catalog/SEI-Packaging.pdf?src-supplier=Arrow+Electronics, ComponentLink5Description=http://www.seielect.com/Catalog/SEI-rmc.pdf?src-supplier=Future+Electronics, ComponentLink5URL=http://www.seielect.com/Catalog/SEI-rmc.pdf?src-supplier=Future+Electronics, ComponentLink6Description=https://www.seielect.com/catalog/SEI-Packaging.pdf?src-supplier=Verical, ComponentLink6URL=https://www.seielect.com/catalog/SEI-Packaging.pdf?src-supplier=Verical, ComponentLink7Description=https://www.seielect.com/catalog/SEI-RMCF_RMCP.pdf?src-supplier=Avnet, ComponentLink7URL=https://www.seielect.com/catalog/SEI-RMCF_RMCP.pdf?src-supplier=Avnet, ComponentLink8Description=https://www.seielect.com/catalog/sei-rmcf_rmcp.pdf?src-supplier=Digikey, ComponentLink8URL=https://www.seielect.com/catalog/sei-rmcf_rmcp.pdf?src-supplier=Digikey, ComponentLink9Description=https://www.seielect.com/catalog/SEI-Packaging.pdf?src-supplier=Quest, ComponentLink9URL=https://www.seielect.com/catalog/SEI-Packaging.pdf?src-supplier=Quest, ComponentLink10Description=https://datasheet.octopart.com/RMCF0603FT1K00-Stackpole-Electronics-datasheet-155966809.pdf?src-supplier=Master+Electronics, ComponentLink10URL=https://datasheet.octopart.com/RMCF0603FT1K00-Stackpole-Electronics-datasheet-155966809.pdf?src-supplier=Master+Electronics, Construction=Rectangular, JESD-609 Code=e3, Manufacturer Part Number=RMCF0603FT1K00, Mounting Technology="Surface Mount", Packaging="Tape and Reel", Pins=2, Pricing="1=0.1, 10=0.02, 100=0.0091, 1000=0.0048, 2500=0.00386 (USD)", Reach SVHC Compliant=Yes, Reference Standard=AEC-Q200, RoHS=Yes, RoHS Compliant=Yes, Stock=3461176, Supplier=Digikey, Technology="METAL GLAZE/THICK FILM", Terminal Finish=Nickel, Termination=Wraparound

## Via types
v1: diameter 1.27, hole 0.711, TopLayer to BottomLayer, 44 vias

## Nets (pads, with @x,y where several pads share a name; then routed paths per layer and width w, separated by ;. In a path a pad name is that pad's centre, name@x,y a point inside that pad or via, vN(x,y) a via of type N, cw(c..) or ccw(c..) an arc to the next point about the centre after c; other vN are vias at no path point)
+3.7V: 1.1 1_1.1 1_1_1.1 2.1 2_1.1 2_1_1.1 C23.1 C24.1 C25.1 C26.1 Designator4.1 Designator5.1 Designator10.1 Designator11.1 Designator12.1 Designator13.1 Designator14.1 J1.3 OP1.8 OP2.8 OP3.8 OP4.8 U1.1 U2.1 U3.1 U4.1 U5.1 | length 85.3
  TopLayer w0.254: U5.1 8.23,29.337 8.484,29.083 v1(8.484,25.781) 12.081,22.184 Designator14.1 ; OP4.8 28.067,10.093 28.24,9.92 C24.1 29.718,8.636 ; OP3.8 28.067,27.619 28.24,27.446 C25.1 v1(29.718,25.781) ; OP1.8 28.067,61.147 28.24,60.974 C23.1 v1(29.718,59.182) ; OP2.8@28.24,44.337 C26.1 v1(29.718,42.418) ; v1(29.718,8.001) 29.718,8.636 ; v1@29.845,8.128 29.845,8.509 29.718,8.636 ; Designator13.1 36.154,62.799 v1(39.751,66.396) Designator4.1@39.751,68.809 ; Designator5.1@39.751,71.476 42.725,68.502 U1.1@43.156,68.502 ; U4.1@49.607,6.629 50.038,6.629 1_1_1.1 ; 2_1_1.1@53.012,6.322 v1(53.012,8.735) 56.609,12.332 Designator10.1 ; Designator11.1 55.524,35.553 56.486,34.591 59.114,34.591 v1(61.013,32.692) 2_1.1@63.426,32.692 ; Designator12.1 55.548,60.392 56.51,59.43 59.138,59.43 v1(61.037,57.531) 2.1@63.45,57.531 ; U3.1@62.968,29.136 63.119,29.287 63.119,29.718 1_1.1 ; U2.1 63.143,54.126 63.143,54.557 1.1
-3.7V: C3.2 C4.2 C5.2 C6.2 J1.1 OP1.4 OP2.4 OP3.4 OP4.4 | length 15.6
  TopLayer w0.254: v1(22.225,13.589) 22.782,14.146 C4.2 OP4.4@24.084,15.621 ; v1(22.225,31.115) 22.782,31.672 C5.2 OP3.4@24.084,33.147 ; v1(22.225,48.006) 22.782,48.563 C6.2 24.084,50.038 24.257,49.865 OP2.4 ; v1(22.225,64.643) 22.782,65.2 C3.2 24.084,66.675 24.257,66.502 OP1.4
GND: C3.1 C4.1 C5.1 C6.1 C23.2 C24.2 C25.2 C26.2 Designator10.2 Designator11.2 Designator12.2 Designator13.2 Designator14.2 J1.2 R1.1 R2.1 R3.1 R4.1 R5.1 R6.1 R7.1 R8.1 R9.1 R10.1 R11.1 R12.1 R13.1 U1.2 U1.8 U2.2 U2.8 U3.2 U3.8 U4.2 U4.8 U5.2 U5.8 | length 15.8
  TopLayer w0.254: U5.8 8.357,38.227 8.357,39.726 v1(8.382,39.751) ; v1(39.243,8.636) 40.395,8.636 40.543,8.487 40.543,6.836 U4.8 ; U1.8@52.197,68.251 52.197,66.523 53.492,66.523 v1(53.594,66.421) ; v1(61.087,18.923) 61.189,19.025 61.189,20.165 U3.8@62.917,20.165 ; U2.8@62.892,45.085 61.164,45.085 v1(61.164,43.765) ; v1(61.164,43.765) 61.087,43.688 v1(61.164,43.765)
  other v1: 31.877,10.668 22.225,11.176 46.581,11.353 58.395,26.261 31.75,28.321 22.225,28.619 11.151,32.131 31.75,45.085 22.225,45.466 58.37,51.181 31.75,61.849 22.225,62.103 46.101,63.729
INPUT_L: C7.1 C8.1 C9.1 C10.1 U5.6 | length 101.4
  TopLayer w0.254: U5.6 U5.6@6.329,35.687 ; C8.1 23.859,6.495 22.005,6.495 12.599,15.901 ; C9.1 20.321,23.623 12.599,15.901 ; C10.1 20.065,40.514 11.854,48.725 ; C7.1 23.859,56.753 19.881,56.753 11.854,48.725 ; U5.6@6.329,35.687 5.623,36.393 5.623,42.495 11.854,48.725 ; U5.6@6.329,35.687 5.573,34.931 5.573,22.927 12.599,15.901
INPUT_R: C11.1 C12.1 C13.1 C14.1 U5.7 | length 100.8
  TopLayer w0.254: U5.7 7.595,36.957 v1(8.357,36.195) ; C12.1 v1(25.527,20.955) ; C13.1 v1(25.527,38.481) ; C14.1 v1(25.527,55.245) ; C11.1 v1(25.527,72.009)
  BottomLayer w0.254: v1@8.524,36.195 v1(8.357,36.195) 8.437,36.275 8.437,38.155 21.717,51.435 ; v1@8.524,36.227 16.859,36.227 ; v1(25.527,20.955) 21.209,20.955 16.891,25.273 16.891,36.195 16.859,36.227 ; v1(25.527,38.481) 23.273,36.227 16.859,36.227 ; v1(25.527,55.245) 21.717,51.435 ; v1(25.527,72.009) 17.526,64.008 17.526,55.626 21.717,51.435
NetC2_2: C19.2 OP1.1 OP1.2 | length 3.5
  TopLayer w0.254: OP1.2 OP1.1 C19.2
NetC4_1: C15.1 OP1.6 OP1.7 | length 3.5
  TopLayer w0.254: OP1.6 OP1.7 C15.1
NetC5_2: C11.2 OP1.3 R3.2 | length 4.1
  TopLayer w0.254: R3.2 23.621,68.327 C11.2 OP1.3
NetC6_2: C7.2 OP1.5 R4.2 | length 4.2
  TopLayer w0.254: R4.2 22.603,58.927 C7.2 OP1.5
NetC9_2: C22.2 OP2.1 OP2.2 | length 3.5
  TopLayer w0.254: OP2.2 OP2.1 C22.2
NetC11_1: C18.1 OP2.6 OP2.7 | length 3.5
  TopLayer w0.254: OP2.6 OP2.7 C18.1
NetC12_2: C14.2 OP2.3 R7.2 | length 4.1
  TopLayer w0.254: R7.2 C14.2 C14.2 OP2.3
NetC13_2: C10.2 OP2.5 R10.2 | length 4.2
  TopLayer w0.254: R10.2 22.603,42.29 C10.2 OP2.5
NetC16_2: C21.2 OP3.1 OP3.2 | length 3.5
  TopLayer w0.254: OP3.2 OP3.1 C21.2
NetC18_1: C17.1 OP3.6 OP3.7 | length 3.5
  TopLayer w0.254: OP3.6 OP3.7 C17.1
NetC19_2: C13.2 OP3.3 R6.2 | length 4.1
  TopLayer w0.254: R6.2 C13.2 C13.2 OP3.3
NetC20_2: C9.2 OP3.5 R9.2 | length 4.2
  TopLayer w0.254: R9.2 22.603,25.399 C9.2 OP3.5
NetC23_2: C20.2 OP4.1 OP4.2 | length 3.5
  TopLayer w0.254: OP4.2 OP4.1 C20.2
NetC25_1: C16.1 OP4.6 OP4.7 | length 3.5
  TopLayer w0.254: OP4.6 OP4.7 C16.1
NetC26_2: C12.2 OP4.3 R5.2 | length 4.1
  TopLayer w0.254: R5.2 C12.2 C12.2 OP4.3
NetC27_2: C8.2 OP4.5 R8.2 | length 4.1
  TopLayer w0.254: R8.2@22.352,7.876 22.355,7.873 C8.2 OP4.5
NetR2_2: P7.1 P8.1 R11.2 U1.3 | length 10.9
  TopLayer w0.254: U1.3@46.07,67.824 49.149,64.745 P8.1 ; R11.2 46.875,57.334 49,57.334 49.149,57.482 P7.1@49.149,60.427
NetR5_2: P2.1 P4.1 R2.2 U2.3 | length 11
  TopLayer w0.254: R2.2 51.975,50.509 51.975,48.282 52.123,48.133 P4.1@55.068,48.133 ; P2.1 59.386,48.133 U2.3@62.465,51.212
NetR8_2: P9.1 P10.1 R13.2 U3.3 | length 11.1
  TopLayer w0.254: R13.2 52,25.642 52,23.362 52.148,23.213 P9.1@55.093,23.213 ; P10.1 58.194,23.213 59.411,23.213 U3.3@62.49,26.292
NetR11_2: P5.1 P6.1 R12.2 U4.3 | length 11.1
  TopLayer w0.254: P6.1@43.533,14.655 43.533,17.6 43.682,17.748 45.757,17.748 R12.2 ; P5.1 43.533,11.554 43.533,10.337 U4.3@46.612,7.258
NetR13_2: P1.1 P3.1 R1.2 U5.3 | length 10.7
  TopLayer w0.254: U5.3 6.802,32.1 7.056,32.1 10.135,35.179 P1.1 ; P3.1 16.002,35.179 17.584,33.597 R1.2
OUTPUT_L1: C15.2 U1.6 | length 36.6
  TopLayer w0.254: C15.2 31.091,57.126 33.655,59.69 33.655,68.275 38.466,73.086 45.172,73.086 49.657,68.601 U1.6
OUTPUT_L2: C18.2 U2.6 | length 39.7
  TopLayer w0.254: C18.2@27.22,40.912 C18.2 53.061,40.489 60.197,47.625 U2.6
OUTPUT_L3: C17.2 U3.6 | length 37.9
  TopLayer w0.254: C17.2@27.22,24.021 C17.2 42.498,23.598 44.236,21.86 59.324,21.86 60.197,22.733 U3.6
OUTPUT_L4: C16.2 U4.6 | length 17.1
  TopLayer w0.254: C16.2@26.987,6.072 C16.2 27.069,5.8 42.347,5.8 43.053,6.506 U4.6
OUTPUT_R1: C19.1 U1.7 | length 28.3
  TopLayer w0.254: C19.1 v1(28.067,72.009) ; v1(50.165,66.523) 50.927,67.285 U1.7@50.927,68.276
  BottomLayer w0.254: v1(28.067,72.009) 44.679,72.009 v1(50.165,66.523)
OUTPUT_R2: C22.1 U2.7 | length 40.3
  TopLayer w0.254: C22.1 v1(28.067,55.245) ; v1(61.214,46.355) U2.7@62.917,46.355
  BottomLayer w0.254: v1(28.067,55.245) 52.324,55.245 v1(61.214,46.355)
OUTPUT_R3: C21.1 U3.7 | length 43.8
  TopLayer w0.254: C21.1 v1(28.067,38.481) ; v1(61.214,21.463) 62.914,21.463 U3.7@62.942,21.435
  BottomLayer w0.254: v1(28.067,38.481) 44.196,38.481 v1(61.214,21.463)
OUTPUT_R4: C20.1 U4.7 | length 23.5
  TopLayer w0.254: C20.1 v1(28.067,20.955) ; U4.7@41.755,6.806 41.755,7.797 v1(42.517,8.559)
  BottomLayer w0.254: v1(28.067,20.955) 30.121,20.955 v1(42.517,8.559)
pads on no net: U1.4 U1.5 U1.9 U1.10 U1.11 U2.4 U2.5 U2.9 U2.10 U2.11 U3.4 U3.5 U3.9 U3.10 U3.11 U4.4 U4.5 U4.9 U4.10 U4.11 U5.4 U5.5 U5.9 U5.10 U5.11

## Polygon pours and split planes (outlines as drawn)
GND on TopLayer "GND_L01_P030" (solid, pour order 30): 15.919,30.099 7.722,30.099 6.706,30.099 6.706,31.115 7.704,31.115 10.117,33.528 15.919,33.528
GND on TopLayer "GND_L01_P038" (solid, pour order 38): 44.069,58.961 44.069,67.158 44.069,68.174 45.085,68.174 45.085,67.176 47.498,64.763 47.498,58.961
GND on TopLayer "GND_L01_P034" (solid, pour order 34): 53.602,53.213 61.799,53.213 62.815,53.213 62.815,52.197 61.817,52.197 59.404,49.784 53.602,49.784
GND on TopLayer "GND_L01_P033" (solid, pour order 33): 53.627,28.293 61.824,28.293 62.84,28.293 62.84,27.277 61.842,27.277 59.457,24.892 53.627,24.892
GND on TopLayer "GND_L01_P032" (solid, pour order 32): 48.613,16.51 48.613,7.924 48.613,6.908 47.597,6.908 47.597,7.906 45.184,10.319 45.184,16.51
GND on TopLayer "GND_L01_P024" (solid, pour order 24): 21.76,35.905 20.109,35.905 20.109,26.634 23.284,26.634 23.284,29.936 21.125,29.936 21.125,32.349 21.76,32.349
GND on TopLayer "GND_L01_P021" (solid, pour order 21): 21.717,18.288 20.066,18.288 20.066,9.017 23.241,9.017 23.241,12.319 21.082,12.319 21.082,14.732 21.717,14.732
GND on TopLayer "GND_L01_P026" (solid, pour order 26): 21.76,52.796 20.109,52.796 20.109,43.525 23.284,43.525 23.284,46.827 21.125,46.827 21.125,49.24 21.76,49.24
GND on TopLayer "GND_L01_P028" (solid, pour order 28): 21.76,69.433 20.109,69.433 20.109,60.162 23.284,60.162 23.284,63.464 21.125,63.464 21.125,65.877 21.76,65.877
GND on TopLayer "GND_L01_P042" (solid, pour order 42): 29.464,61.595 29.464,63.373 33.147,63.373 33.147,60.452 30.988,60.452 30.099,61.595
GND on TopLayer "GND_L01_P043" (solid, pour order 43): 29.464,44.958 29.464,46.736 33.401,46.736 33.401,43.815 30.988,43.815 30.099,44.958
GND on TopLayer "GND_L01_P044" (solid, pour order 44): 29.464,28.067 29.464,29.845 33.401,29.845 33.401,26.924 30.988,26.924 30.099,28.067
GND on TopLayer "GND_L01_P045" (solid, pour order 45): 29.464,10.541 29.464,12.319 33.401,12.319 33.401,9.398 30.988,9.398 30.099,10.541
GND on MidLayer1 (split plane): 64.643,69.596 69.594,69.596 69.594,5.381 64.643,5.381 64.643,0.51 5.381,0.51 5.381,5.381 0.51,5.381 0.51,69.549 5.461,69.549 5.461,74.49 64.643,74.49
+3.7V on MidLayer2 (split plane): 64.643,69.596 69.594,69.596 69.594,5.461 64.643,5.461 64.643,0.51 5.381,0.51 5.381,5.461 0.51,5.461 0.51,69.469 5.461,69.469 5.461,74.49 64.643,74.49
-3.7V on MidLayer2 (split plane): 23.747,4.955 19.358,4.955 10.543,13.77 10.543,26.797 10.534,26.847 10.506,26.889 4.701,32.693 4.701,56.969 10.125,62.392 19.231,71.499 23.747,71.499

## Keep-outs
Keep-Out Layer:
  the board outline again, w0.254

## Other copper
MidLayer1 (plane layer: these items are gaps in the copper):
  rectangle: 64.643,69.596 69.643,74.596
  rectangle: 64.643,0.381 69.643,5.381
  rectangle: 0.381,0.381 5.381,5.381
  rectangle: 0.461,69.549 5.461,74.549
MidLayer2 (plane layer: these items are gaps in the copper):
  rectangle: 64.643,69.596 69.643,74.676
  rectangle: 64.643,0.381 69.643,5.461
  rectangle: 0.381,0.381 5.381,5.461
  rectangle: 0.461,69.469 5.461,74.549
  lines w0.254: 10.414,13.716 19.304,4.826 23.876,4.826 23.876,71.628 19.177,71.628 10.033,62.484 4.572,57.023 4.572,32.639 10.414,26.797 ; 10.414,13.716 10.414,26.797 ; 10.414,13.716 10.414,26.797

## Silkscreen, mask and mechanical layers (free items; w line width, h text height)
Top Overlay:
  drawing of 25 lines, arcs and shapes, not listed
  text "+" at 36.703,72.238 h1.52 r270
  text "+3.7V" at 13.462,70.485 h1 r270
  text "-" at 36.703,69.317 h1.52 r270
  text "+" at 50.419,64.11 h1.52 r270
  text "GND" at 13.462,64.008 h1 r270
  text "-" at 50.165,60.96 h1.52 r270
  text "-" at 63.958,60.579 h1.52 r180
  text "+" at 66.879,60.579 h1.52 r180
  text "-3.7V" at 13.462,59.436 h1 r270
  text "-" at 55.576,46.863 h1.52 r180
  text "+" at 58.751,46.863 h1.52 r180
  text "+" at 10.82,36.449 h1.52
  text "-" at 13.995,36.449 h1.52
  text "-" at 63.934,35.74 h1.52 r180
  text "+" at 66.855,35.74 h1.52 r180
  text "-" at 55.576,21.971 h1.52 r180
  text "+" at 58.751,21.971 h1.52 r180
  text "-" at 42.263,14.144 h1.52 r90
  text "+" at 42.263,10.969 h1.52 r90
  text "-" at 56.06,5.814 h1.52 r90
  text "+" at 56.06,2.893 h1.52 r90